# Altium PCB PCB1_old.PcbDoc (part 1 of 2)
Units mil, origin at the board's own origin, x right, y up, seen from the top; angles counter-clockwise.
Board outline 3631 x 2044 mil, 4 copper layers (Top Layer, GND, VDD, Bottom Layer), stack 62.449 mil thick; 137 components, 90 nets, 469 pads, 29 vias.
Unrouted connection lines stored in the file: 180.
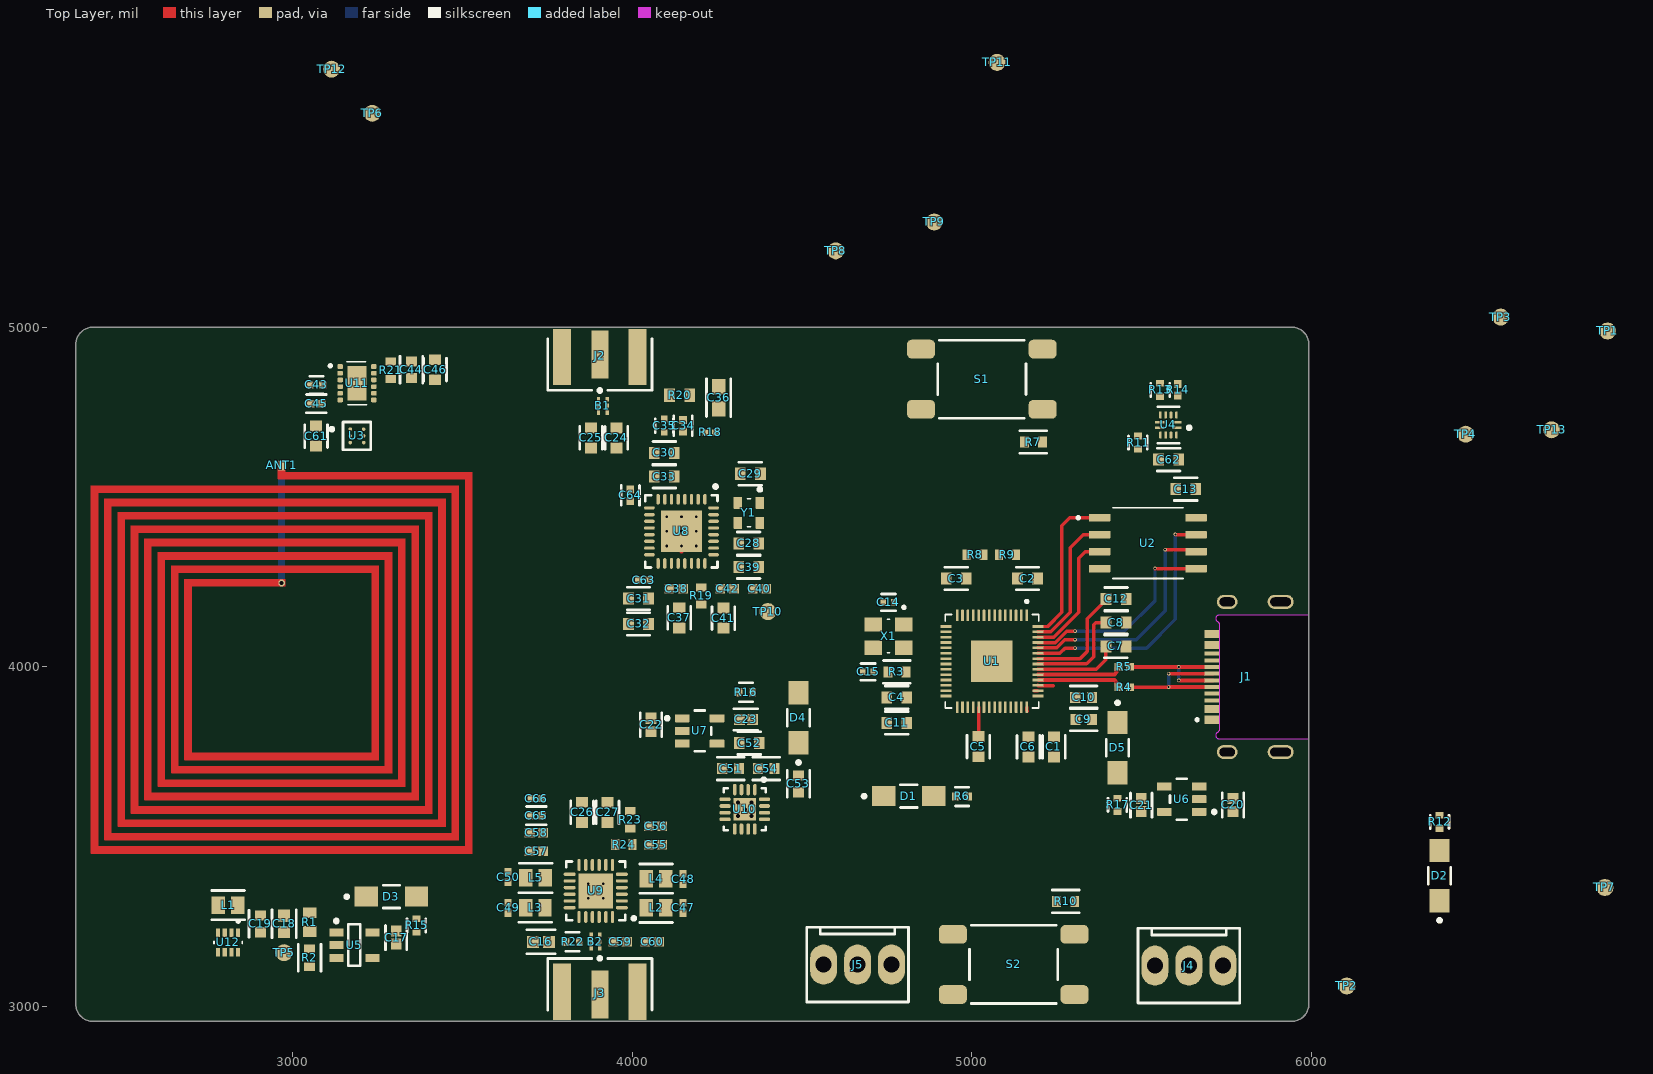
[diagram p0: Top Layer view]
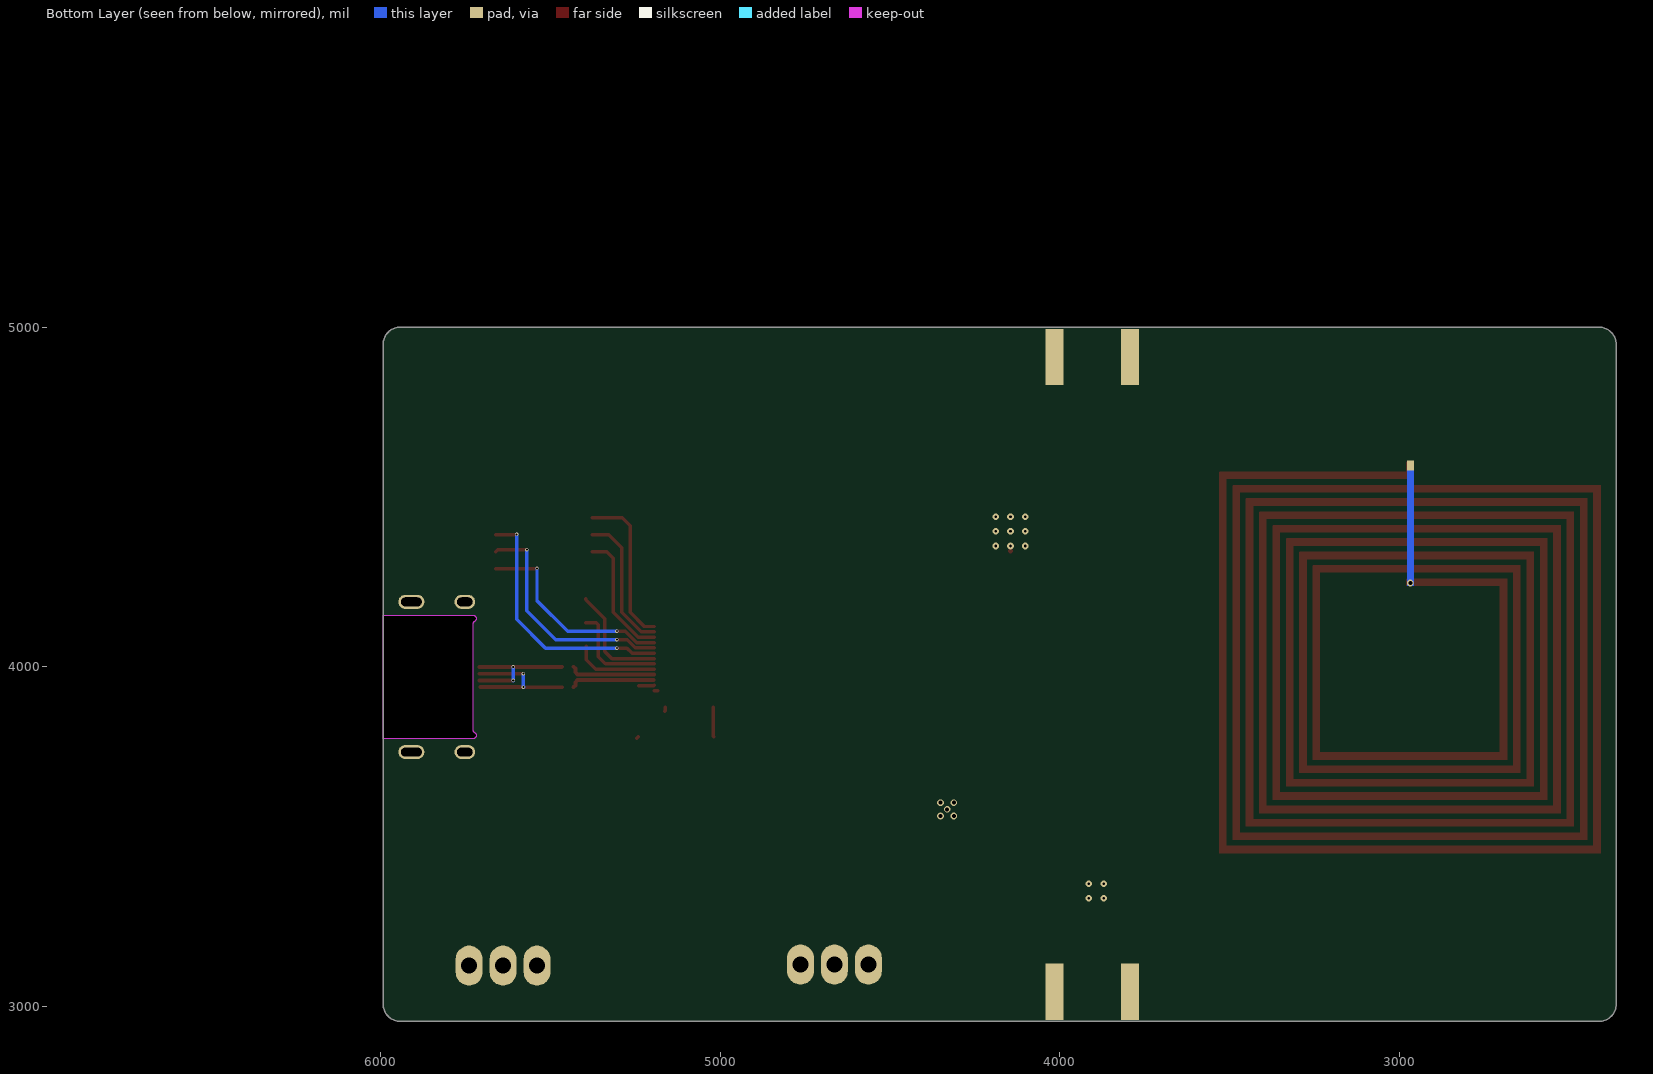
[diagram p1: Bottom Layer view, seen from below]
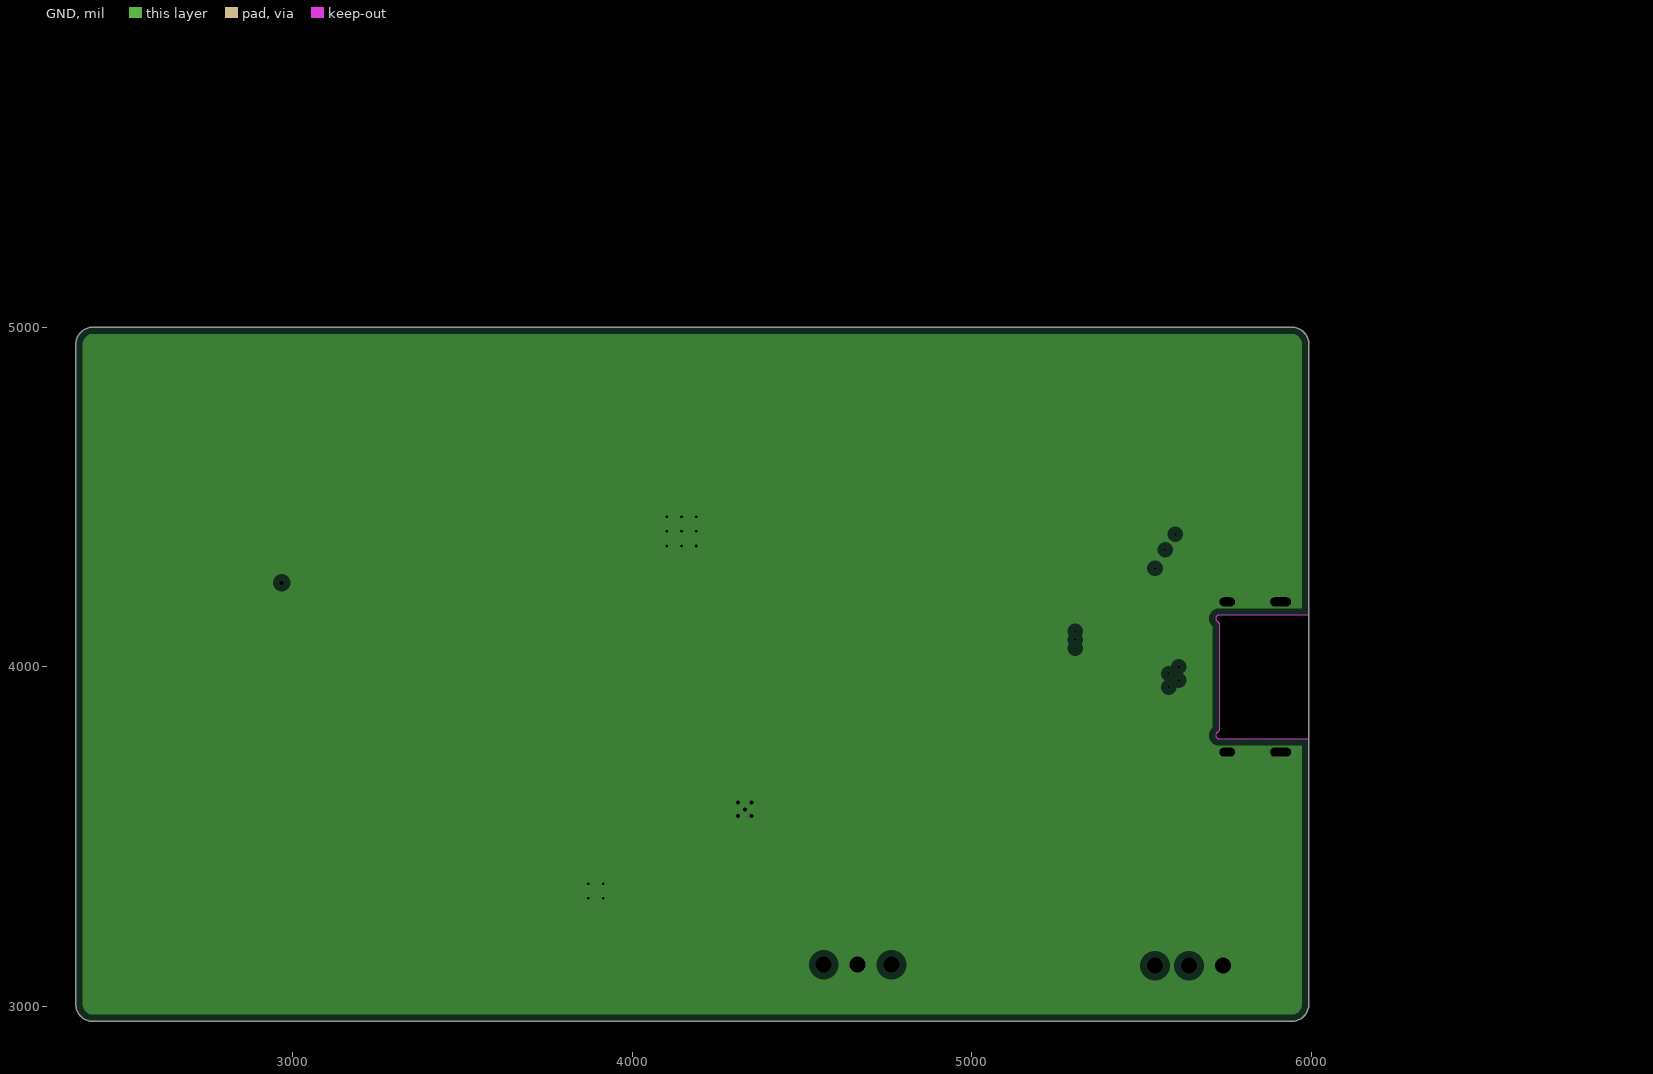
[diagram p2: GND, clearances drawn from the general rule]
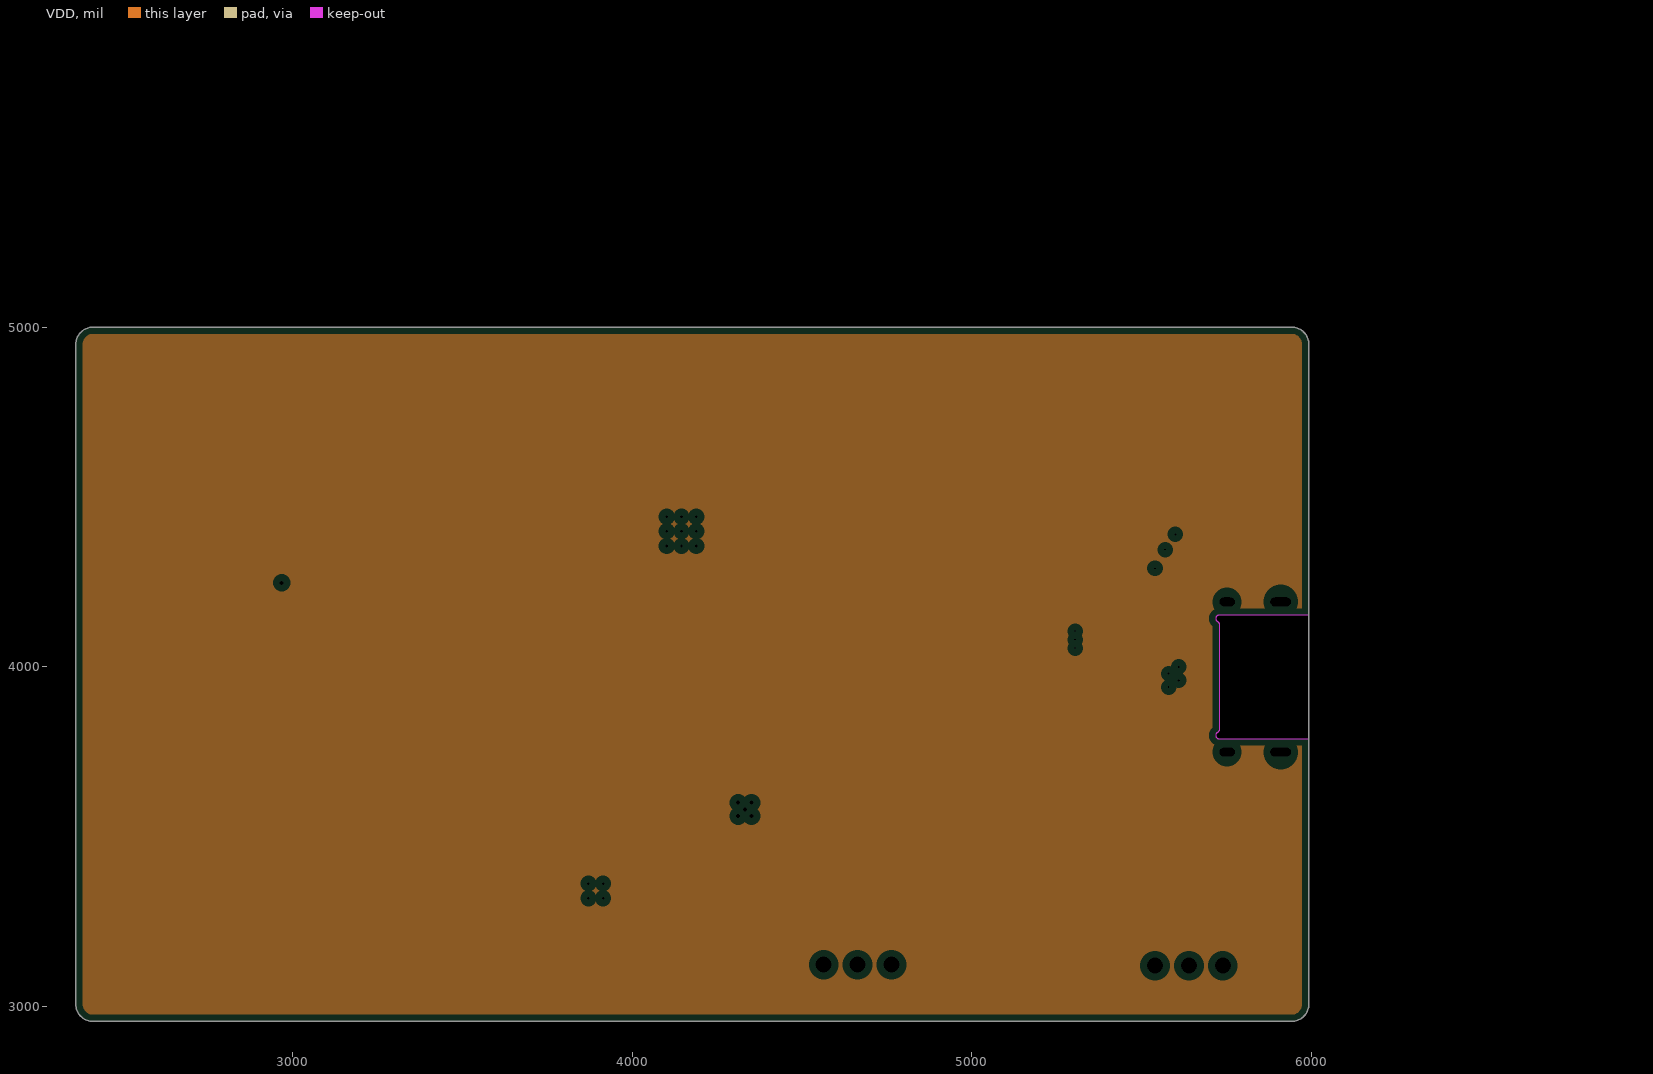
[diagram p3: VDD, clearances drawn from the general rule]

## Layer stack, top to bottom
Top Solder: solder mask 0.4, Solder Resist, Dk 3.5
Top Layer: signal copper 1.378
Dielectric 2: prepreg 8.284, PP-006, Dk 4.4
GND: plane copper 0.598, net GND
Dielectric 1: core 41.929, FR-4, Dk 4.6
VDD: plane copper 0.598, net +3V3
Dielectric 3: prepreg 8.284, PP-006, Dk 4.4
Bottom Layer: signal copper 1.378
Bottom Solder: solder mask 0.4, Solder Resist, Dk 3.5

## Board outline
2362,3006 2362,4950 cw(c2412,4950) 2412,5000 5943,5000 cw(c5943,4950) 5993,4950 5993,3006 cw(c5943,3006) 5943,2956 2412,2956 cw(c2412,3006)

## Design rules (kind name [scope] priority, off if disabled: settings)
Clearance [All] p1: gap=4 ignorepadtopadclearanceinfootprint=FALSE except(5: Arc-Via Track-Via SMDPad-Via THPad-Via Via-Via Via-Fill Via-Poly Via-Region Via-Text; 9.84: Arc-Hole Track-Hole SMDPad-Hole THPad-Hole Via-Hole Fill-Hole Poly-Hole Region-Hole Text-Hole)
DiffPairsRouting [All] p1: maxlimit=10 minlimit=5 mostfreqgap=8 toplayer_minwidth=6.5 toplayer_maxwidth=50 toplayer_prefwidth=10 bottomlayer_minwidth=6.5 bottomlayer_maxwidth=50 bottomlayer_prefwidth=10 maxuncoupledlength=500
PlaneClearance [All] p1: clearance=20
PlaneConnect [All] p1: planeconnectstyle=Relief reliefexpansion=20 reliefentries=4 reliefconductorwidth=10 reliefairgap=10
PolygonConnect [All] p1: connectstyle=Relief reliefconductorwidth=10 reliefentries=4 polygonreliefangle="90 Angle" airgapwidth=10
RoutingVias [All] p1: holewidth=6 width=10 viastyle="Through Hole" minholewidth=6 minwidth=10 maxholewidth=28 maxwidth=50
SilkToSolderMaskClearance [IsPad] p1: minsilkscreentomaskgap=6 clearancetoexposedcopper=TRUE
SolderMaskExpansion [All] p1: expansion=4 istentingtop=FALSE
SupplyNets "Schematic Supply Nets_3" [InNet('+3V3A')] p1: voltage=0.000
SupplyNets "Schematic Supply Nets_2" [InNet('+5')] p2: voltage=0.000
SupplyNets "Schematic Supply Nets_1" [InNet('+3V3')] p3: voltage=0.000
SupplyNets "Schematic Supply Nets" [InNet('GND')] p4: voltage=0.000
Width [All] p1: maxlimit=50 minlimit=10 preferedwidth=10 minimp=50.000000 maximp=50.000000 favimp=50.000000
26 further rules are at their usual default settings.

## Classes and differential pairs
component class top: J1 J2 J3
component class Designator: C1 C2 C3 C4 C5 C6 C7 C8 C9 C10 C11 C12 C13 C14 C15 C61 D1 J4 J5 R3 R4 R5 R6 R7 R8 R9 R10 S1 S2 TP1 TP2 TP3 U1 U2 U3 X1
differential pair USB: +USB_P -USB_N
differential pair rfoutB: +rfoutB_P -rfoutB_N
differential pair rfoutA: +rfoutA_P -rfoutA_N
differential pair rf_ref: +rf_ref_P -rf_ref_N
differential pair res_out: +res_out_P -res_out_N
differential pair Q: +Q_P -Q_N
differential pair Q_O: +Q_O_P -Q_O_N
differential pair I: +I_P -I_N
differential pair I_O: +I_O_P -I_O_N

## Components (designator, comment, footprint, x,y, rotation, side; value= is the part's Value field where it differs from the comment)
ANT1 "nfc_antenna" nfc_antenna 2945,3980 r270 top
B1 "LDB182G8AAAEA050" Balum 3913.9,4768.51 r0 top
B2 "LDB182G8AAAEA050" Balum 3892.2,3190.32 r180 top
C1 "CC0603KRX7R7BB104" FP-CC0603-DA-MFG 5242,3764 r270 top value="100 nF"
C2 "CC0603KRX7R7BB104" FP-CC0603-DA-MFG 5164.53,4260 r0 top value="100 nF"
C3 "CC0603KRX7R7BB104" FP-CC0603-DA-MFG 4955,4260 r180 top value="100 nF"
C4 "CC0603KRX7R7BB104" FP-CC0603-DA-MFG 4779.53,3910 r180 top value="100 nF"
C5 "CC0603KRX7R7BB104" FP-CC0603-DA-MFG 5020,3765 r270 top value="100 nF"
C6 "CC0603KRX7R7BB104" FP-CC0603-DA-MFG 5167,3764 r270 top value="100 nF"
C7 "CC0603KRX7R7BB104" FP-CC0603-DA-MFG 5425,4060 r0 top value="100 nF"
C8 "CC0603KRX7R7BB104" FP-CC0603-DA-MFG 5425.47,4130 r0 top value="100 nF"
C9 "CL10B105KP8NNNC" FP-CL10-IPC_C 5330.32,3845 r0 top
C10 "CL10B105KP8NNNC" FP-CL10-IPC_C 5329.68,3910 r0 top
C11 "CC0603KRX7R7BB104" FP-CC0603-DA-MFG 4779.53,3835 r180 top value="100 nF"
C12 "CC0603KRX7R7BB104" FP-CC0603-DA-MFG 5425.47,4200 r0 top value="100 nF"
C13 "CC0603KRX7R7BB104" FP-CC0603-DA-MFG 5630.6,4523.3 r180 top value="100 nF"
C14 "GJM1555C1H150GB01D" FP-GJM155-0_05-MFG 4755,4190 r180 top
C15 "GJM1555C1H150GB01D" FP-GJM155-0_05-MFG 4695,3985 r180 top
C16 "GRM188R61A226ME15D" FP-GRM188-0_2-IPC_C 3731.36,3190 r0 top
C17 "GRM155R61A106ME11D" FP-GRM155-0_2-IPC_A 3305.2,3202.28 r270 top
C18 "GRM188R61A226ME15D" FP-GRM188-0_2-IPC_C 2975.2,3243.03 r90 top
C19 "CL10B105KP8NNNC" FP-CL10-IPC_C 2905.2,3243.03 r90 top
C20 "GRM155R61A106ME11D" FP-GRM155-0_2-IPC_A 5769.69,3593.29 r90 top
C21 "GRM155R61A106ME11D" FP-GRM155-0_2-IPC_A 5499.69,3592.54 r90 top
C22 "GRM155R61A106ME11D" FP-GRM155-0_2-IPC_A 4056,3829.25 r270 top
C23 "GRM155R61A106ME11D" FP-GRM155-0_2-IPC_A 4335,3845 r0 top
C24 "CC0603KRX7R7BB104" FP-CC0603-DA-MFG 3953.9,4673.98 r90 top value="100 nF"
C25 "CC0603KRX7R7BB104" FP-CC0603-DA-MFG 3878.9,4673.98 r90 top value="100 nF"
C26 "CC0603KRX7R7BB104" FP-CC0603-DA-MFG 3852.87,3571.1 r270 top value="100 nF"
C27 "CC0603KRX7R7BB104" FP-CC0603-DA-MFG 3927.87,3571.1 r270 top value="100 nF"
C28 "CC0603KRX7R7BB104" FP-CC0603-DA-MFG 4343.43,4363.51 r0 top value="100 nF"
C29 "CC0603KRX7R7BB104" FP-CC0603-DA-MFG 4348.43,4568.51 r0 top value="100 nF"
C30 "CC0603KRX7R7BB104" FP-CC0603-DA-MFG 4095,4630 r180 top value="100 nF"
C31 "CC0603KRX7R7BB104" FP-CC0603-DA-MFG 4018.98,4201.1 r180 top value="100 nF"
C32 "CC0603KRX7R7BB104" FP-CC0603-DA-MFG 4018.98,4126.1 r180 top value="100 nF"
C33 "CC0603KRX7R7BB104" FP-CC0603-DA-MFG 4095,4560 r180 top value="100 nF"
C34 "GCM155R71C393KA37D" FP-GCM155-0_05-IPC_B 4150,4710 r90 top
C35 "CC0402KPX7R9BB272" FP-CC0402-MFG 4095,4710 r90 top value="2.7 nF"
C36 "GCM1885C1H122JA16J" FP-GCM188-0_1-IPC_A 4255,4792.55 r90 top
C37 "CC0603KRX7R7BB104" FP-CC0603-DA-MFG 4138.9,4143.98 r270 top value="100 nF"
C38 "CC0402JRNPO9BN100" CAPC1005X55X25ML05T05 4130,4230 r0 top
C39 "CC0603KRX7R7BB104" FP-CC0603-DA-MFG 4343.43,4293.51 r0 top value="100 nF"
C40 "CC0402JRNPO9BN100" CAPC1005X55X25ML05T05 4375.08,4230 r180 top
C41 "CC0603KRX7R7BB104" FP-CC0603-DA-MFG 4268.9,4143.51 r270 top value="100 nF"
C42 "CC0402JRNPO9BN100" CAPC1005X55X25ML05T05 4279.92,4230 r180 top
C43 "GRM1555C1H120GA01D" FP-GRM155-0_05-MFG 3070,4830 r180 top
C44 "CL10B105KP8NNNC" FP-CL10-IPC_C 3350,4874.68 r90 top
C45 "GCM1555C1H620GA16J" FP-GCM155-0_05-IPC_B 3070,4775 r180 top value=62pF
C46 "CC0603KRX7R7BB104" FP-CC0603-DA-MFG 3420,4875 r90 top value="100 nF"
C47 "GRM1555C1H270JA01D" CAPC1005X55X25LL05T10 4150,3289.65 r90 top
C48 "GRM1555C1H270JA01D" CAPC1005X55X25LL05T10 4150,3375 r270 top
C49 "1" CAPC1005X55X25LL05T10 3635,3289.65 r90 top
C50 "GRM1555C1H270JA01D" CAPC1005X55X25LL05T10 3635,3380.35 r270 top
C51 "CL10B105KP8NNNC" FP-CL10-IPC_C 4290.32,3700 r180 top
C52 "CC0603KRX7R7BB104" FP-CC0603-DA-MFG 4345,3775 r0 top value="100 nF"
C53 "CL10B105KP8NNNC" FP-CL10-IPC_C 4490,3655 r90 top
C54 "CL10B105KP8NNNC" FP-CL10-IPC_C 4395,3700 r0 top
C55 "GRM155R71H102KA01D" CAPC1005X55X25ML5T10 4069.29,3476.41 r180 top
C56 "GRM1555C1H101JA01D" CAPC1005X55X25ML05T10 4069.29,3530 r180 top
C57 "GRM155R71H102KA01D" CAPC1005X55X25ML5T10 3717.87,3456.57 r0 top
C58 "GRM1555C1H101JA01D" CAPC1005X55X25ML05T10 3717.87,3511.57 r0 top
C59 "GRM155R71H102KA01D" CAPC1005X55X25ML5T10 3965,3190 r0 top
C60 "GRM1555C1H101JA01D" CAPC1005X55X25ML05T10 4059.29,3190 r180 top
C61 "CC0603KRX7R7BB104" FP-CC0603-DA-MFG 3069.37,4679.53 r270 top value="100 nF"
C62 "CC0603KRX7R7BB104" FP-CC0603-DA-MFG 5580,4610 r180 top value="100 nF"
C63 "1" CAPC1005X55X25LL05T10 4035,4255 r0 top
C64 "GCM155R71C393KA37D" FP-GCM155-0_05-IPC_B 3995,4505 r90 top
C65 "GCM155R71C393KA37D" FP-GCM155-0_05-IPC_B 3717.87,3561.57 r180 top
C66 "1" CAPC1005X55X25LL05T10 3717.87,3611.57 r0 top
D1 "CMD15-21VRD/TR8" FP-CMD15-21-MFG 4815.11,3619.05 r0 top
D2 "CMD15-21VRD/TR8" FP-CMD15-21-MFG 6377.95,3385.11 r90 top
D3 "CMD15-21VRD/TR8" FP-CMD15-21-MFG 3291.38,3323.03 r0 top
D4 "CMD15-21VRD/TR8" FP-CMD15-21-MFG 4490,3850 r90 top
D5 "CMD15-21VRD/TR8" FP-CMD15-21-MFG 5429.69,3762.11 r270 top
J1 "GSB1C4621DS1HR" AMPHENOL_GSB1C4621DS1HR 5910,3970 r90 top
J2 "SMA-J-P-H-ST-EM1" FP-SMA-J-P-H-ST-EM1-MFG 3905,5182.2 r180 top
J3 "SMA-J-P-H-ST-EM1" FP-SMA-J-P-H-ST-EM1-MFG 3905,2772.8 r0 top
J4 "0022272031" "MOLEX KK 0022272031" 5640,3120 r180 top
J5 "0022272031" "MOLEX KK 0022272031" 4664,3123 r180 top
L1 "LQM21PN1R0NGRD" FP-LQM21PH_G0-IPC_C 2810.2,3298.03 r0 top
L2 "LQM21PN1R0NGRD" FP-LQM21PH_G0-IPC_C 4070.63,3290 r0 top
L3 "LQM21PN1R0NGRD" FP-LQM21PH_G0-IPC_C 3715,3291 r180 top
L4 "LQM21PN1R0NGRD" FP-LQM21PH_G0-IPC_C 4070.63,3376 r0 top
L5 "LQM21PN1R0NGRD" FP-LQM21PH_G0-IPC_C 3716,3378 r180 top
R1 "RK73H1JTTD91R0F" RESC1608X55X30NL20T10 3050.2,3248.03 r270 top
R2 "RC0603FR-071KL" FP-RC0603-0_55-IPC_C 3050.2,3143.03 r270 top
R3 "RC0603FR-071KL" FP-RC0603-0_55-IPC_C 4780,3985 r0 top
R4 "RC0402JR-0727RL" RESC1005X40X25NL05T10 5450,3940 r0 top
R5 "RC0402JR-0727RL" RESC1005X40X25NL05T10 5450,4000 r0 top
R6 "RT0402BRD07200RL" FP-RT0402-MFG 4972.11,3618.05 r0 top value=200Ω
R7 "RC0603FR-071KL" FP-RC0603-0_55-IPC_C 5182,4662 r0 top
R8 "RC0603FR-074K7L" RESC1608X55X25LL10T15 5010,4330 r180 top
R9 "RC0603FR-074K7L" RESC1608X55X25LL10T15 5105.59,4330 r0 top
R10 "RC0603FR-071KL" FP-RC0603-0_55-IPC_C 5277,3309 r180 top
R11 "RT0402BRD07200KL" FP-RT0402-MFG 5490,4660 r270 top value=200KΩ
R12 "RT0402BRD07200RL" FP-RT0402-MFG 6377.95,3543.43 r90 top value=200Ω
R13 "RT0402BRD07200KL" FP-RT0402-MFG 5555,4815.31 r90 top value=200KΩ
R14 "RC0402FR-07910KL" RESC1005X40X25NL05T10 5607.13,4815.47 r270 top value=900k
R15 "RT0402BRD07200RL" FP-RT0402-MFG 3365.2,3238.35 r270 top value=200Ω
R16 "RT0402BRD07200RL" FP-RT0402-MFG 4335,3925 r180 top value=200Ω
R17 "RT0402BRD07200RL" FP-RT0402-MFG 5429.69,3593.29 r270 top value=200Ω
R18 "RC0402JR-07680RL" RESC1005X40X25LL05T10 4230,4690 r0 top
R19 "RC0603FR-074K7L" RESC1608X55X25LL10T15 4203.9,4208.51 r90 top
R20 "RC0603JR-07360RL" RESC1608X55X25ML10T15 4140,4800 r0 top
R21 "RC0603FR-074K7L" RESC1608X55X25LL10T15 3289,4873 r270 top
R22 "RT0402BRD07200RL" FP-RT0402-MFG 3825,3190 r180 top value=200Ω
R23 "RC0603FR-074K7L" RESC1608X55X25LL10T15 3995,3550 r90 top
R24 "RC0603FR-074K7L" RESC1608X55X25LL10T15 3976,3476.41 r0 top
S1 "FSM4JSMA" "TE FSM4JSMA" 5030,4847 r90 top
S2 "FSM4JSMA" "TE FSM4JSMA" 5123.87,3123.42 r270 top
TP1 "Test Point" test_point 6873,4989 r90 top
TP2 "Test Point" test_point 6105,3060 r0 top
TP3 "Test Point" test_point 6558,5030 r90 top
TP4 "Test Point" test_point 6455,4685 r0 top
TP5 "Test Point" test_point 2975.2,3158.03 r90 top
TP6 "Test Point" test_point 3235,5630 r90 top
TP7 "Test Point" test_point 6865,3350 r0 top
TP8 "Test Point" test_point 4600,5225 r270 top
TP9 "Test Point" test_point 4890,5310 r270 top
TP10 "Test Point" test_point 4399.9,4162.51 r0 top
TP11 "Test Point" test_point 5075,5780 r90 top
TP12 "Test Point" test_point 3115,5760 r90 top
TP13 "Test Point" test_point 6708,4698 r90 top
U1 "rp2040" QFN40P700X700X90-57N 5059.88,4016.24 r270 top
U2 "W25Q128JVSIQ" SOIC127P790X216-8N 5519.18,4364.05 r0 top
U3 "HDC2010YPAR" FP-YPA0006-MFG 3189.68,4680 r0 top
U4 "TUSB320LAIRWBR" FP-RWB0012A-MFG 5579.41,4712.13 r180 top
U5 "AP7375-50W5-7" "DIODES SOT25" 3182.05,3180.43 r0 top
U6 "TLV73333PDBVR" FP-DBV0005A-MFG 5618.82,3610 r180 top
U7 "TLV73333PDBVR" FP-DBV0005A-MFG 4199,3811 r0 top
U8 "ADF4351BCPZ-RL7" ADI-CP-32-2_L 4145.51,4398.9 r270 top
U9 "ADL5380ACPZ-R7" ADI-CP-24-3_N 3893.03,3339.8 r180 top
U10 "ADS7945SRTER" TI-RTE16-1700X1700TP_V 4331.93,3580.16 r270 top
U11 "ST25DV64KC-JF6D3" PSON50P300X300X60-13N 3190,4835 r0 top
U12 "TPS631000DRLR" SOT50P160X60-8N 2810.2,3188.03 r270 top
X1 "ABM8-272-T3" XTAL_ABM8-272-T3 4755.28,4090.55 r270 top
Y1 "LMK6CE02500CDLFR" DLF0004A_MFG 4343.9,4453.51 r270 top

## Footprints (in the part's own frame and the unit in brackets; to place one, negate y for a bottom-side part, rotate by r counter-clockwise, add the part's x,y. Pads: shape width x height; smd on the part's side, far side on the other; paste and mask are expansions set on the pad)
ADI-CP-24-3_N [mm] "QFN, 24-Leads, Body 4x4mm, Pitch 0.5mm, Thermal Pad 2.5x2.5mm, IPC Medium Density"
  oval 0.9x0.25 smd: 1(-1.95,1.25) 2(-1.95,0.75) 3(-1.95,0.25) 4(-1.95,-0.25) 5(-1.95,-0.75) 6(-1.95,-1.25) 13(1.95,-1.25) 14(1.95,-0.75) 15(1.95,-0.25) 16(1.95,0.25) 17(1.95,0.75) 18(1.95,1.25)
  oval 0.25x0.9 smd: 7(-1.25,-1.95) 8(-0.75,-1.95) 9(-0.25,-1.95) 10(0.25,-1.95) 11(0.75,-1.95) 12(1.25,-1.95) 19(1.25,1.95) 20(0.75,1.95) 21(0.25,1.95) 22(-0.25,1.95) 23(-0.75,1.95) 24(-1.25,1.95)
  rect 2.6x2.6 smd: 25(0,0)
  silkscreen extent -2.98,-2.2 2.2,2.2, body extent -2.05,-2.05 2.05,2.05, height 1
ADI-CP-32-2_L [mm] "QFN, 32-Leads, Body 5x5mm, Pitch 0.5mm, Thermal Pad 3.1x3.1mm, IPC High Density"
  oval 0.8x0.25 smd: 1(-2.4,1.75) 2(-2.4,1.25) 3(-2.4,0.75) 4(-2.4,0.25) 5(-2.4,-0.25) 6(-2.4,-0.75) 7(-2.4,-1.25) 8(-2.4,-1.75) 17(2.4,-1.75) 18(2.4,-1.25) 19(2.4,-0.75) 20(2.4,-0.25) 21(2.4,0.25) 22(2.4,0.75) 23(2.4,1.25) 24(2.4,1.75)
  oval 0.25x0.8 smd: 9(-1.75,-2.4) 10(-1.25,-2.4) 11(-0.75,-2.4) 12(-0.25,-2.4) 13(0.25,-2.4) 14(0.75,-2.4) 15(1.25,-2.4) 16(1.75,-2.4) 25(1.75,2.4) 26(1.25,2.4) 27(0.75,2.4) 28(0.25,2.4) 29(-0.25,2.4) 30(-0.75,2.4) 31(-1.25,2.4) 32(-1.75,2.4)
  rect 3.1x3.1 smd: 33(0,0)
  silkscreen extent -3.47,-2.7 2.7,2.7, body extent -2.55,-2.55 2.55,2.55, height 1
AMPHENOL_GSB1C4621DS1HR [mm]
  rect 0.6x1.1 smd mask+0.05: A1_B12(-3.2,5.15) A4_B9(-2.4,5.15) B1_A12(3.2,5.15) B4_A9(2.4,5.15)
  rect 0.3x1.1 smd mask+0.05: A5(-1.25,5.15) A6(-0.25,5.15) A7(0.25,5.15) A8(1.25,5.15) B5(1.75,5.15) B6(0.75,5.15) B7(-0.75,5.15) B8(-1.75,5.15)
  oval 1.05x1.55 hole 0.65 slot 1.15 at 90 deg: SH1(-5.62,4) SH2(5.62,4)
  oval 1.05x1.95 hole 0.65 slot 1.55 at 90 deg: SH3(-5.62,0) SH4(5.62,0)
  Keep-Out Layer board cut-out: -4.619,4.622 -4.62,4.6 -4.62,-2.1 4.62,-2.1 4.62,4.6 4.619,4.622 4.616,4.643 4.611,4.665 4.605,4.686 4.597,4.706 4.587,4.725 4.575,4.743 4.562,4.761 4.547,4.777 4.531,4.792 4.513,4.805 4.495,4.817 4.476,4.827 4.456,4.835 4.435,4.841 4.413,4.846 4.392,4.849 4.37,4.85 4.348,4.849 4.327,4.846 4.305,4.841 4.284,4.835 4.264,4.827 4.245,4.817 4.227,4.805 4.209,4.792 4.193,4.777 4.178,4.761 4.165,4.743 4.154,4.725 4.149,4.718 4.144,4.71 4.139,4.703 4.134,4.696 4.129,4.689 4.123,4.683 4.117,4.676 4.111,4.67 4.104,4.664 4.098,4.658 4.091,4.653 4.084,4.648 4.077,4.643 4.069,4.638 4.062,4.633 4.054,4.629 4.047,4.625 4.039,4.622 4.031,4.618 4.022,4.615 4.014,4.612 4.006,4.61 3.997,4.607 3.989,4.605 3.98,4.604 3.972,4.602 3.963,4.601 3.954,4.601 3.946,4.6 3.937,4.6 -3.937,4.6 -3.946,4.6 -3.954,4.601 -3.963,4.601 -3.972,4.602 -3.98,4.604 -3.989,4.605 -3.997,4.607 -4.006,4.61 -4.014,4.612 -4.022,4.615 -4.031,4.618 -4.039,4.622 -4.047,4.625 -4.054,4.629 -4.062,4.633 -4.069,4.638 -4.077,4.643 -4.084,4.648 -4.091,4.653 -4.098,4.658 -4.104,4.664 -4.111,4.67 -4.117,4.676 -4.123,4.683 -4.129,4.689 -4.134,4.696 -4.139,4.703 -4.144,4.71 -4.149,4.718 -4.154,4.725 -4.165,4.743 -4.178,4.761 -4.193,4.777 -4.209,4.792 -4.227,4.805 -4.245,4.817 -4.264,4.827 -4.284,4.835 -4.305,4.841 -4.327,4.846 -4.348,4.849 -4.37,4.85 -4.392,4.849 -4.413,4.846 -4.435,4.841 -4.456,4.835 -4.476,4.827 -4.495,4.817 -4.513,4.805 -4.531,4.792 -4.547,4.777 -4.562,4.761 -4.575,4.743 -4.587,4.725 -4.597,4.706 -4.605,4.686 -4.611,4.665 -4.616,4.643
  silkscreen extent -3.3,6.15 -3.1,6.35, body extent -5.77,3.51 5.77,10.71, height 1.58
Balum [mm]
  rect 0.25x0.35 smd mask+0.05: 1(-0.325,0.5) 2(-0.325,0) 3(-0.325,-0.5) 4(0.325,-0.5) 5(0.325,0) 6(0.325,0.5)
CAPC1005X55X25LL05T10 [mm] "Chip Capacitor, 2-Leads, Body 1.00x0.50mm, IPC High Density"
  rect 0.56x0.52 smd: 1(-0.39,0) 2(0.39,0)
  body extent -0.53,-0.28 0.53,0.28, height 0.55
CAPC1005X55X25ML05T05 [mm] "Chip Capacitor, 2-Leads, Body 1.00x0.50mm, IPC Low Density"
  rect 0.72x0.72 smd: 1(-0.51,0) 2(0.51,0)
  body extent -0.53,-0.28 0.53,0.27, height 0.55
CAPC1005X55X25ML5T10 [mm] "Chip Capacitor, 2-Leads, Body 1.05x0.55mm, IPC Low Density"
  rect 0.76x0.72 smd: 1(-0.49,0) 2(0.49,0)
  body extent -0.53,-0.28 0.53,0.28, height 0.55
CAPC1005X55X25ML05T10 [mm] "Chip Capacitor, 2-Leads, Body 1.00x0.50mm, IPC Low Density"
  rect 0.76x0.72 smd: 1(-0.49,0) 2(0.49,0)
  body extent -0.53,-0.28 0.53,0.27, height 0.55
"DIODES SOT25" [mm] "SOT25, 5-Leads, Body 3.00x2.85mm, Pitch 0.95mm, IPC Medium Density"
  rect 1.05x0.6 smd: 1(-1.35,0.95) 2(-1.35,0) 3(-1.35,-0.95) 4(1.35,-0.95) 5(1.35,0.95)
  silkscreen extent -1.47,-1.55 0.45,1.92, body extent -1.5,-1.55 1.5,1.55, height 1.45
DLF0004A_MFG [mm] "Recommended Land Pattern"
  rrect15% 0.9x0.65 smd: 1(-0.75,0.825) 2(-0.75,-0.825) 3(0.75,-0.825) 4(0.75,0.825)
  silkscreen extent -1.87,-0.13 1.05,0.95, body extent -1.3,-1.4 1.3,1.4, height 0.25
FP-CC0402-MFG [mm]
  rect 0.5x0.5 smd paste+0 mask+0: 1(-0.5,0) 2(0.5,0)
  silkscreen extent -0.53,-0.68 0.53,0.67, body extent -0.87,-0.48 0.87,0.48, height 0.25
FP-CC0603-DA-MFG [mm]
  rect 0.8x0.9 smd paste+0 mask+0: 1(-0.75,0) 2(0.75,0)
  silkscreen extent -0.85,-0.85 0.85,0.85, body extent -1.35,-0.75 1.35,0.75, height 0.25
FP-CL10-IPC_C [mil]
  rect 29.85x31.97 smd paste+0 mask+0: 1(-24.68,0) 2(24.68,0)
  silkscreen extent -40,-33 40,33, body extent -44,-22 44,22, height 10
FP-CMD15-21-MFG [mm]
  rect 1.75x1.5 smd paste+0 mask+0: 1(-1.875,0) 2(1.875,0)
  silkscreen extent -3.47,-0.85 0.63,0.85, body extent -2.85,-0.95 2.85,0.95, height 0.25
FP-DBV0005A-MFG [mm]
  rrect17% 1.1x0.6 smd paste+0 mask+0: 1(-1.3,0.95) 2(-1.3,0) 3(-1.3,-0.95) 4(1.3,-0.95) 5(1.3,0.95)
  silkscreen extent -2.55,-1.53 0.87,1.52, body extent -1.95,-1.78 1.95,1.78, height 0.25
FP-GCM155-0_05-IPC_B [mil]
  rect 24.23x22.54 smd paste+0 mask+0: 1(-16.87,0) 2(16.87,0)
  silkscreen extent -29,-27 29,27, body extent -35,-17 35,17, height 10
FP-GCM188-0_1-IPC_A [mil]
  rect 45.62x39.85 smd paste+0 mask+0: 1(-32.55,0) 2(32.55,0)
  silkscreen extent -55,-36 55,36, body extent -75,-40 75,40, height 10
FP-GJM155-0_05-MFG [mm]
  rect 0.4x0.5 smd paste+0 mask+0: 1(-0.4,0) 2(0.4,0)
  silkscreen extent -0.53,-0.63 0.53,0.63, body extent -0.7,-0.38 0.7,0.38, height 0.25
FP-GRM155-0_2-IPC_A [mil]
  rect 32.6x31.74 smd paste+0 mask+0: 1(-19.25,0) 2(19.25,0)
  silkscreen extent -36,-32 36,32, body extent -43,-24 43,24, height 10
FP-GRM155-0_05-MFG [mm]
  rect 0.55x0.5 smd paste+0 mask+0: 1(-0.475,0) 2(0.475,0)
  silkscreen extent -0.5,-0.65 0.5,0.65, body extent -0.85,-0.38 0.85,0.38, height 0.25
FP-GRM188-0_2-IPC_C [mil]
  rect 35.63x35.68 smd paste+0 mask+0: 1(-23.64,0) 2(23.64,0)
  silkscreen extent -41,-35 41,35, body extent -45,-24 45,24, height 10
FP-LQM21PH_G0-IPC_C [mil]
  rect 39.61x51.5 smd paste+0 mask+0: 1(-28.59,0) 2(28.59,0)
  silkscreen extent -48,-43 48,43, body extent -52,-31 52,31, height 10
FP-RC0603-0_55-IPC_C [mil]
  rect 25.93x31.97 smd paste+0 mask+0: 1(-26.64,0) 2(26.64,0)
  silkscreen extent -40,-33 40,33, body extent -44,-22 44,22, height 10
FP-RT0402-MFG [mm]
  rect 0.5x0.6 smd paste+0 mask+0: 1(-0.5,0) 2(0.5,0)
  silkscreen extent -0.5,-0.71 0.5,0.7, body extent -0.85,-0.4 0.85,0.4, height 0.25
FP-RWB0012A-MFG [mm]
  rrect50% 0.7x0.2 smd paste-1000 mask+0: 1(-0.65,0.2) 2(-0.65,-0.2) 7(0.65,-0.2) 8(0.65,0.2)
  rrect50% 0.2x0.5 smd paste+0 mask+0: 3(-0.6,-0.75) 4(-0.2,-0.75) 5(0.2,-0.75) 6(0.6,-0.75) 9(0.6,0.75) 10(0.2,0.75) 11(-0.2,0.75) 12(-0.6,0.75)
  silkscreen extent -1.68,-1.38 0.8,1.38, body extent -1.1,-1.1 1.1,1.1, height 0.25
FP-SMA-J-P-H-ST-EM1-MFG [mm]
  rect 1.27x3.6 smd paste+0 mask+0: 1(0,6.66)
  rect 1.35x4.2 smd paste+0 mask+0: 2(-2.825,6.86) 3(2.825,6.86)
  rect 1.35x4.2 smd far side paste+0 mask+0: 4(-2.825,6.86) 5(2.825,6.86)
  silkscreen extent -3.9,5.5 3.9,9.48, body extent -3.6,-4.92 3.6,9.06, height 0.25
FP-YPA0006-MFG [mm]
  round 0.263 smd paste-1000 mask-1000: A1(-0.5,0.5) A2(0.5,0.5) B1(-0.5,0) B2(0.5,0) C1(-0.5,-0.5) C2(0.5,-0.5)
  silkscreen extent -2,-1.04 1.04,1.04, body extent -1.24,-1.24 1.24,1.24, height 0.25
"MOLEX KK 0022272031" [mm]
  oval 2x3 hole 1.2: 1(-2.54,0) 2(0,0) 3(2.54,0)
  silkscreen extent -3.81,-2.79 3.81,2.79, body extent -3.81,-2.9 3.81,2.9, height 11.7
nfc_antenna [mil]
  rect 30x20 smd: 1(-613,23)
  rect 30x21 smd far side: 1(-613,23)
  Top Layer region: 528.76,-537.54 -553.88,-537.54 -553.88,545.1 489.39,545.1 489.39,-498.17 -514.51,-498.17 -514.51,505.73 450.02,505.73 450.02,-458.8 -475.14,-458.8 -475.14,466.36 410.65,466.36 410.65,-419.43 -435.77,-419.43 -435.77,426.99 371.28,426.99 371.28,-380.06 -396.4,-380.06 -396.4,387.62 331.91,387.62 331.91,-340.69 -357.03,-340.69 -357.03,348.25 292.54,348.25 292.54,-301.32 -317.66,-301.32 -317.66,308.88 253.17,308.88 253.17,-261.95 -278.29,-261.95 -278.29,33.29 -258.64,33.29 -258.64,-242.28 -258.64,-242.3 -258.62,-242.3 233.5,-242.3 233.52,-242.3 233.53,-242.28 233.53,289.21 233.52,289.23 233.5,289.23 -297.99,289.23 -298.01,289.23 -298.01,289.21 -298.01,-281.65 -298.01,-281.67 -297.99,-281.67 272.87,-281.67 272.89,-281.67 272.9,-281.65 272.9,328.58 272.89,328.6 272.87,328.6 -337.36,328.6 -337.38,328.6 -337.38,328.58 -337.38,-321.02 -337.38,-321.04 -337.36,-321.04 312.24,-321.04 312.26,-321.04 312.27,-321.02 312.27,367.95 312.26,367.97 312.24,367.97 -376.73,367.97 -376.75,367.97 -376.75,367.95 -376.75,-360.39 -376.75,-360.41 -376.73,-360.42 351.61,-360.41 351.63,-360.41 351.64,-360.39 351.64,407.32 351.63,407.34 351.61,407.34 -416.1,407.34 -416.12,407.34 -416.12,407.32 -416.12,-399.76 -416.12,-399.78 -416.1,-399.78 390.98,-399.78 391,-399.78 391.01,-399.76 391.01,446.69 391,446.71 390.98,446.71 -455.47,446.71 -455.49,446.71 -455.49,446.69 -455.49,-439.13 -455.49,-439.15 -455.47,-439.16 430.35,-439.16 430.37,-439.15 430.38,-439.13 430.38,486.06 430.37,486.08 430.35,486.08 -494.84,486.08 -494.86,486.08 -494.86,486.06 -494.86,-478.5 -494.86,-478.52 -494.84,-478.53 469.72,-478.53 469.74,-478.52 469.75,-478.5 469.75,525.43 469.74,525.45 469.72,525.45 -534.21,525.45 -534.23,525.45 -534.23,525.43 -534.23,-517.87 -534.23,-517.89 -534.21,-517.9 509.09,-517.9 509.11,-517.89 509.12,-517.87 509.12,564.8 509.11,564.82 509.09,564.82 -573.58,564.82 -573.6,564.82 -573.6,564.8 -573.6,13.64 -622.77,13.64 -622.77,33.29 -593.27,33.29 -593.25,33.29 -593.25,33.31 -593.25,584.47 528.76,584.47
  Top Layer lines w0.04: 528.78,-537.56 -553.9,-537.56 -553.9,545.12 489.41,545.12 489.41,-498.19 -514.53,-498.19 -514.53,505.75 450.04,505.75 450.04,-458.82 -475.16,-458.82 -475.16,466.38 410.67,466.38 410.67,-419.45 -435.79,-419.45 -435.79,427.01 371.3,427.01 371.3,-380.08 -396.42,-380.08 -396.42,387.64 331.93,387.64 331.93,-340.71 -357.05,-340.71 -357.05,348.27 292.56,348.27 292.56,-301.34 -317.68,-301.34 -317.68,308.9 253.19,308.9 253.19,-261.97 -278.31,-261.97 -278.31,33.31 -258.62,33.31 -258.62,-242.28 233.5,-242.28 233.5,289.21 -297.99,289.21 -297.99,-281.65 272.87,-281.65 272.87,328.58 -337.36,328.58 -337.36,-321.02 312.24,-321.02 312.24,367.95 -376.73,367.95 -376.73,-360.39 351.61,-360.39 351.61,407.32 -416.1,407.32 -416.1,-399.76 390.98,-399.76 390.98,446.69 -455.47,446.69 -455.47,-439.13 430.35,-439.13 430.35,486.06 -494.84,486.06 -494.84,-478.5 469.72,-478.5 469.72,525.43 -534.21,525.43 -534.21,-517.87 509.09,-517.87 509.09,564.8 -573.58,564.8 -573.58,13.62 -622.8,13.62 -622.8,33.31 -593.27,33.31 -593.27,584.49 528.78,584.49 528.78,-537.56
  Bottom Layer region: -623.03,12.79 -257.87,12.79 -257.87,33.46 -623.03,33.46
PSON50P300X300X60-13N [mm]
  rrect50% 0.42x0.35 smd: 1(-1.26,1.25) 2(-1.26,0.75) 3(-1.26,0.25) 4(-1.26,-0.25) 5(-1.26,-0.75) 6(-1.26,-1.25) 7(1.26,-1.25) 8(1.26,-0.75) 9(1.26,-0.25) 10(1.26,0.25) 11(1.26,0.75) 12(1.26,1.25)
  rect 1.4x2.55 smd paste-2: 13(0,0)
  silkscreen extent -2.1,-1.6 0.7,1.6, body extent -1.51,-1.51 1.51,1.51, height 0.6
QFN40P700X700X90-57N [mm]
  rrect25% 0.84x0.2 smd: 1(-3.435,2.6) 2(-3.435,2.2) 3(-3.435,1.8) 4(-3.435,1.4) 5(-3.435,1) 6(-3.435,0.6) 7(-3.435,0.2) 8(-3.435,-0.2) 9(-3.435,-0.6) 10(-3.435,-1) 11(-3.435,-1.4) 12(-3.435,-1.8) 13(-3.435,-2.2) 14(-3.435,-2.6) 29(3.435,-2.6) 30(3.435,-2.2) 31(3.435,-1.8) 32(3.435,-1.4) 33(3.435,-1) 34(3.435,-0.6) 35(3.435,-0.2) 36(3.435,0.2) 37(3.435,0.6) 38(3.435,1) 39(3.435,1.4) 40(3.435,1.8) 41(3.435,2.2) 42(3.435,2.6)
  rrect25% 0.2x0.84 smd: 15(-2.6,-3.435) 16(-2.2,-3.435) 17(-1.8,-3.435) 18(-1.4,-3.435) 19(-1,-3.435) 20(-0.6,-3.435) 21(-0.2,-3.435) 22(0.2,-3.435) 23(0.6,-3.435) 24(1,-3.435) 25(1.4,-3.435) 26(1.8,-3.435) 27(2.2,-3.435) 28(2.6,-3.435) 43(2.6,3.435) 44(2.2,3.435) 45(1.8,3.435) 46(1.4,3.435) 47(1,3.435) 48(0.6,3.435) 49(0.2,3.435) 50(-0.2,3.435) 51(-0.6,3.435) 52(-1,3.435) 53(-1.4,3.435) 54(-1.8,3.435) 55(-2.2,3.435) 56(-2.6,3.435)
  rect 3.1x3.1 smd paste-0.57: 57(0,0)
  silkscreen extent -4.57,-3.5 3.5,3.5, body extent -3.5,-3.5 3.5,3.5, height 0.9
RESC1005X40X25LL05T10 [mm] "Chip Resistor, 2-Leads, Body 1.00x0.50mm, IPC High Density"
  rect 0.5x0.45 smd: 1(-0.375,0) 2(0.375,0)
  body extent -0.53,-0.27 0.53,0.28, height 0.4
RESC1005X40X25NL05T10 [mm] "Chip Resistor, 2-Leads, Body 1.00x0.50mm, IPC Medium Density"
  rect 0.6x0.55 smd: 1(-0.425,0) 2(0.425,0)
  body extent -0.53,-0.27 0.53,0.28, height 0.4
RESC1608X55X25LL10T15 [mm] "Chip Resistor, 2-Leads, Body 1.60x0.80mm, IPC High Density"
  rect 0.6x0.8 smd: 1(-0.65,0) 2(0.65,0)
  body extent -0.85,-0.45 0.85,0.45, height 0.55
RESC1608X55X25ML10T15 [mm] "Chip Resistor, 2-Leads, Body 1.60x0.80mm, IPC Low Density"
  rect 0.8x1 smd: 1(-0.75,0) 2(0.75,0)
  body extent -0.85,-0.45 0.85,0.45, height 0.55
RESC1608X55X30NL20T10 [mm] "Chip Resistor, 2-Leads, Body 1.60x0.80mm, IPC Medium Density"
  rect 0.8x1 smd: 1(-0.7,0) 2(0.7,0)
  body extent -0.9,-0.5 0.9,0.5, height 0.55
SOIC127P790X216-8N [mm]
  rrect25% 1.61x0.58 smd: 1(-3.605,1.905) 2(-3.605,0.635) 3(-3.605,-0.635) 4(-3.605,-1.905) 5(3.605,-1.905) 6(3.605,-0.635) 7(3.605,0.635) 8(3.605,1.905)
  silkscreen extent -5.31,-2.64 2.64,2.64, body extent -3.95,-2.64 3.95,2.64, height 2.16
SOT50P160X60-8N [mm]
  rect 0.66x0.32 smd mask+0.05: 1(-0.735,0.75) 2(-0.735,0.25) 3(-0.735,-0.25) 4(-0.735,-0.75) 5(0.735,-0.75) 6(0.735,-0.25) 7(0.735,0.25) 8(0.735,0.75)
  silkscreen extent -1.7,-1.05 0.09,1.05, body extent -0.8,-1.05 0.8,1.05, height 0.6
"TE FSM4JSMA" [mm]
  rrect50% 1.4x2.1 smd: 1(2.25,4.55) 2(2.25,-4.55) 3(-2.25,4.55) 4(-2.25,-4.55)
  silkscreen extent -2.92,-3.3 2.92,3.3, body extent -3,-5 3,5, height 5.08
test_point [mil]
  round 50 smd: 1(0,0)
TI-RTE16-1700X1700TP_V [mm] "QFN, 16-Leads, Body 3x3mm, Pitch 0.5mm, Thermal Pad 1.7x1.7mm"
  oval 0.85x0.28 smd: 1(-1.475,0.75) 2(-1.475,0.25) 3(-1.475,-0.25) 4(-1.475,-0.75) 9(1.475,-0.75) 10(1.475,-0.25) 11(1.475,0.25) 12(1.475,0.75)
  oval 0.28x0.85 smd: 5(-0.75,-1.475) 6(-0.25,-1.475) 7(0.25,-1.475) 8(0.75,-1.475) 13(0.75,1.475) 14(0.25,1.475) 15(-0.25,1.475) 16(-0.75,1.475)
  rect 1.7x1.7 smd: 17(0,0)
  silkscreen extent -2.35,-1.57 1.57,1.58, body extent -1.5,-1.5 1.5,1.5, height 0.8
XTAL_ABM8-272-T3 [mm]
  rect 1.05x1.3 smd: 1(-0.875,1.15) 2(-0.875,-1.15) 3(0.875,-1.15) 4(0.875,1.15)
  silkscreen extent -2.24,-0.09 1.25,1.25, body extent -1.25,-1.6 1.25,1.6, height 0.7

## Part data
C1 C2 C3 C4 C5 C6 C7 C8 C11 C12 C13 C24 C25 C26 C27 C28 C29 C30 C31 C32 C33 C37 C39 C41 C46 C52 C61 C62: library part CMP-2000-05002-2, "CAP CER 0.1UF 16V X7R 0603", Capacitance="100 nF", Manufacturer=YAGEO, Package=CC0603-DA, Temperature="-55°C to +125°C", Temperature Characteristic=X7R, Temperature Coefficient=15%, Temperature Range High=+125°C, Temperature Range Low=-55°C, Tolerance=0.1, Voltage="16 V", Automotive=No, Category=Cap, ComponentLink2Description=Datasheet, ComponentLink2URL=http://www.yageo.com/documents/recent/UPY-GPHC_X7R_6.3V-to-50V_18.pdf, Device Class L1="Passive Components", Device Class L2=Capacitors, Device Class L3="Ceramic Capacitors", Digikey Description="CAP CER 0.1UF 16V X7R 0603", Footprint Url=http://www.yageo.com/exep/pages/download/literatures/UPY-C_GEN_24.pdf, Height=0.9mm, Lead Free=Yes, Manufacturer Part Number=CC0603KRX7R7BB104, Material=Ceramic, Mouser Description="Multilayer Ceramic Capacitor, CC Series, 0.1 - F, - 10%, X7R, 16 V, 0603 [1608 Metric]", Octopart=https://octopart.com/cc0603krx7r7bb104-yageo-192941, RoHS=TRUE, Voltage Rating="16 V"
C9 C10 C19 C44 C51 C53 C54: library part CMP-2000-06094-2, "Cap Ceramic 1uF 10V X7R ±10% Pad SMD 0603 +125°C T/R", Capacitance=1uF, Case Code (Imperial)=0603, Case Code (Metric)=1608, Dielectric=X7R, Max Operating Temperature=125°C, Min Operating Temperature=-55°C, Package Quantity=1, Tolerance=10%, Voltage Rating=10V, Case/Package=0603, Contact Plating=Tin, Depth=0.8mm, Height=0.8mm, Lead Free="Lead Free", Length=1.6mm, Mount="Surface Mount", Packaging="Tape and Reel", Radiation Hardening=No, Thickness=0.035inch, Voltage Rating (DC)=10V, Width=0.031inch
C14 C15: library part CMP-2008-03803-2, "Multi-Layer Ceramic Capacitor 15pF C0G  ±2% 0402 Paper T/R", Capacitance=15pF, Case Code (Imperial)=0402, Case Code (Metric)=1005, Dielectric=C0G, Max Operating Temperature=125°C, Min Operating Temperature=-55°C, Package Quantity=10000, Tolerance=2%, Voltage Rating=50V, Case/Package=0402, Depth=0.5mm, Height=0.5mm, Lead Free="Lead Free", Length=1mm, Mount="Surface Mount", Packaging="Tape and Reel", Radiation Hardening=No, Termination=SMD/SMT, Thickness=0.022inch, Voltage Rating (DC)=50V, Width=0.02inch
C16 C18: library part CMP-2000-06337-3, "Chip Multilayer Ceramic Capacitors for General Purpose, 0603, 22uF, X5R, 15%, 20%, 10V", Capacitance=22uF, Case Code (Imperial)=0603, Case Code (Metric)=1608, Dielectric=X5R, Max Operating Temperature=85°C, Min Operating Temperature=-55°C, Package Quantity=4000, Tolerance=20%, Voltage Rating=10V, Case/Package=0603, Depth=0.8mm, Height=0.8mm, Lead Free="Lead Free", Length=1.6mm, Material=Ceramic, Mount="Surface Mount", Packaging="Tape and Reel", REACH SVHC="No SVHC", Termination=SMD/SMT, Thickness=0.039inch, Voltage Rating (DC)=10V, Weight=0.000222oz, Width=0.8mm
C17 C20 C21 C22 C23: library part CMP-06035-026070-1, "Chip Multilayer Ceramic Capacitors for General Purpose, 0402, 10uF, X5R, 15%, 20%, 10V"
C34 C64 C65: library part CMP-06035-054841-1, "Ceramic Capacitor for Automotive 39nF ±10% 16VDC X7R 0402 Paper T/R", Capacitance=39nF, Case Code (Imperial)=0402, Case Code (Metric)=1005, Max Operating Temperature=125°C, Min Operating Temperature=-55°C, Ratings=AEC-Q200, Tolerance=10%, Voltage Rating=16V, Case/Package=0402, Mount="Surface Mount", Packaging="Cut Tape"
C35: library part CMP-03422-000661-1, "CC0402 2.7 nF X7R 10.00% 50 V", Capacitance="2.7 nF", Manufacturer=YAGEO, Package=CC0402, Temperature="-55°C to +125°C", Temperature Characteristic=X7R, Temperature Coefficient=30ppm/°C, Temperature Range High=+125°C, Temperature Range Low=-55°C, Tolerance=0.1, Voltage Rating="50 V", Automotive=No, Automotive Grade=NA, Category=Cap, ComponentLink2Description=Datasheet, ComponentLink2URL=http://www.yageo.com/documents/recent/UPY-GP_NP0_16V-to-50V_16.pdf, Device Class L1="Passive Components", Device Class L2=Capacitors, Device Class L3="Ceramic Capacitors", Footprint Url=http://www.yageo.com/exep/pages/download/literatures/UPY-C_GEN_24.pdf, Height=0.55mm, Ipc Land Pattern Name=CAPC10050X50, Lead Free=Yes, Manufacturer Part Number=CC0402KPX7R9BB272, Material=Ceramic, Octopart=https://octopart.com/cc0402kpx7r9bb272-yageo-84795372, RoHS=TRUE
C36: library part CMP-06035-017544-1, "Ceramic Capacitor for Automotive 1.2nF  ±5% 50VDC C0G 0603 Paper T/R", Capacitance=1.2nF, Case Code (Imperial)=0603, Case Code (Metric)=1608, Dielectric=C0G, Max Operating Temperature=125°C, Min Operating Temperature=-55°C, Package Quantity=10000, Ratings=AEC-Q200, Tolerance=5%, Voltage Rating=50V, Case/Package=0603, Height=0.8mm, Length=0.063inch, Mount="Surface Mount", Packaging="Tape and Reel", Termination=SMD/SMT, Thickness=0.035inch, Voltage Rating (DC)=50V, Weight=0.000222oz, Width=0.031inch
C38 C40 C42: library part CMP-2100-03589-1, "Chip Capacitor, 10 pF, +/- 5%, 50 V, -55 to 125 degC, 0402 (1005 Metric), RoHS, Tape and Reel", Capacitance=10pF, Case Code (Imperial)=0402, Case Code (Metric)=1005, Dielectric=C0G, Dielectric Material=Ceramic, Insulation Resistance=100GR, Manufacturer=Yageo, Max Operating Temperature=125degC, Min Operating Temperature=-55degC, Package Description="2-Pin Surface Mount Device, Body 1 x 0.5 mm", Package Quantity=1, Temperature Coefficient=30ppm/degC, Tolerance=5%, Voltage=50V, Case/Package=0402, Composition=Ceramic, Datasheet URL=http://www.yageo.com/documents/recent/UPY-GP_NP0_16V-to-50V_14.pdf, Datasheet Version="Rev. 14, 07/2016", Depth=0.5mm, Height=0.5mm, Lead Free=LeadFree, Length=1mm, Manufacturer URL=http://www.yageo.com/, Mount=SurfaceMount, Number of Pins=2, Package Reference=0402, Packaging=TapeandReel, Radiation Hardening=No, REACH SVHC=NoSVHC, RoHSCompliant=True, Termination=SMD/SMT, Thickness=0.022inch, Voltage Rating=50V, Voltage Rating (DC)=50V, Width=0.02inch
C43: library part CMP-2008-03945-2, "CAP CER 12PF 50V C0G/NP0 0402", Capacitance=12pF, Case Code (Imperial)=0402, Case Code (Metric)=1005, Dielectric=C0G, Max Operating Temperature=125°C, Min Operating Temperature=-55°C, Package Quantity=10000, Tolerance=2%, Voltage=50V, Case/Package=0402, Construction=Flat, Depth=0.5mm, Height=0.5mm, Lead Free="Lead Free", Length=1mm, Material=Ceramic, Mount="Surface Mount", Packaging="Tape and Reel", Radiation Hardening=No, REACH SVHC="No SVHC", Series=GRM, Termination=SMD/SMT, Thickness=0.022inch, Voltage Rating=50V, Voltage Rating (DC)=50V, Width=0.5mm
C45: library part CMP-06035-017743-1, "Ceramic Capacitor for Automotive 62pF ±2% 50VDC C0G 0402 Paper T/R"
C47 C48 C50: library part CMP-2008-03917-1, Manufacturer=Murata, Part Number=GRM1555C1H270JA01D
C49 C63 C66: library part CMP-2008-03917-1, Manufacturer=Murata, Part Number=GRM1555C1H270JA01D
C55 C57 C59: library part CMP-1662-00017-1, "Chip Capacitor, 1 nF, +/- 10%, 50 V, -55 to 125 degC, 0402 (1005 Metric), RoHS, Tape and Reel", Capacitance="1 nF", Case Code (Imperial)=0402, Case Code (Metric)=1005, Max Operating Temperature="125 degC", Min Operating Temperature="-55 degC", Package Quantity=10000, Tolerance=10%, Type (Capacitors)=X7R, Voltage Rating="50 V", Case\/Package=0402, ComponentLink1Description="Manufacturer URL", ComponentLink1URL=http://www.murata.com/, ComponentLink2Description=Datasheet, ComponentLink2URL=http://psearch.en.murata.com/capacitor/product/GRM155R71H102KA01%23.pdf, DatasheetVersion=07/2016, Height="0.5 mm", Length="1 mm", Mount="Surface Mount", Mounting Technology="Surface Mount", PackageDescription="2-Pin Surface Mount Device, Body 1 x 0.5 mm", PackageReference=0402, Packaging="Tape and Reel", Pins=2, Radiation Hardening=No, REACH SVHC="No SVHC", RoHSCompliant=true, Voltage Rating (DC)="50 V", Width="0.5 mm"
C56 C58 C60: library part CMP-2008-03915-1, Manufacturer=Murata, Part Number=GRM1555C1H101JA01D
D1 D2 D3 D4 D5: library part CMP-53976-000002-1, "LED RED DIFFUSED 1206 SMD", Colour=Red, Forward Current=20mA, Forward Voltage=2V, Manufacturer=VCC, Package=CMD15-21, Power Dissipation=105mW, Reverse Voltage=5V, Temperature="-40°C to +85°C", Temperature Range High=+85°C, Temperature Range Low=-40°C, Automotive=No, Category=Diode, ComponentLink2Description=Datasheet, ComponentLink2URL=https://www.vcclite.com/wp-content/uploads/wpallimport/files/files/CMD1521SeriesRev1.pdf, Device Class L1=Optoelectronics, Device Class L2=LEDs, Device Class L3=unset, Digikey Description="LED RED DIFFUSED 1206 SMD", Height=1.3mm, Lead Free=Yes, Led Orientation="Top View", Luminous Intensity=4mcd, Manufacturer Part Number=CMD15-21VRD/TR8, Mouser Description="Standard LEDs - SMD RED DIFFUSED", Octopart=https://octopart.com/cmd15-21vrd%2Ftr8-vcc-26668835, Peak Emmision Wavelength=640nm, RoHS=TRUE
J2 J3: library part CMP-02754-000006-1, "CONN SMA JACK STR 50OHM EDGE MNT", Case/Package=SMA, Dielectric Material=PTFE, Housing Color=Gold, Max Frequency=6GHz, Max Operating Temperature=125°C, Min Operating Temperature=-65°C, Package Quantity=1, Voltage Rating=335V, Body Material=Brass, Body Plating=Gold, Center Contact Plating=Gold, Connector Type=SMA, Contact Material=Copper, Contact Plating=Gold, Depth=13.33mm, Fastening Type=Threaded, Impedance=50R, Insulation Material=Polytetrafluoroethylene, Length=6.35mm, Mount=Edge, Orientation=Straight, Packaging=Tray, Radiation Hardening=No, RoHS Compliant=Yes, Series=SMA, Termination=Solder
J4 J5: "CONN HEADER VERT 3POS 2.54MM", Insulation Color=Natural, Manufacturer=Molex, Material Flammability Rating="UL94 V-0", Supplier Part Number 1=WM4112-ND, ComponentLink1Description=Datasheet, ComponentLink1URL=https://www.molex.com/pdm_docs/sd/022272031_sd.pdf, ComponentLink2Description="DigiKey Link", ComponentLink2URL=http://digikey.com/product-detail/en/molex/0022272031/WM4112-ND/1130578, Connector Type=Header, Contact Finish - Mating=Tin, Contact Finish - Post=Tin, Contact Finish Thickness - Mating="100.0µin (2.54µm)", Contact Length - Mating="0.295\" (7.49mm)", Contact Length - Post="0.140\" (3.56mm)", Contact Material=Brass, Contact Shape=Square, Contact Type="Male Pin", Fastening Type="Friction Lock", Insulation Height="0.461\" (11.70mm)", Insulation Material="Polyamide (PA), Nylon", LastUpdated="1/12/2020 11:51:54 PM", Lifecycle Status=Active, Minimum Order=1, Mounting Type="Through Hole", Number of Positions=3, Number of Positions Loaded=All, Number of Rows=1, Overall Contact Length="0.560\" (14.22mm)", Packaging=Bulk, Part Number=0022272031, Part Status=Active, PartId=77, Pitch - Mating="0.100\" (2.54mm)", Price=0.37, Series="KK 6410", Shrouding="Shrouded - 1 Wall", Style="Board to Cable/Wire", Supplier 1=DigiKey, Termination=Solder
L1 L2 L3 L4 L5: library part CMP-06042-017027-1, "Multilayer Type Inductor for Power Lines, 0805 (2012), 1μH, 30%, 0.0825Ω, 1.3A", Case Code (Imperial)=0805, Case Code (Metric)=2012, Current Rating=1.3A, DC Resistance (DCR)=82.5mR, Inductance=1uH, Inductance Tolerance=30%, Max Operating Temperature=125°C, Min Operating Temperature=-55°C, Package Quantity=4000, Self Resonant Frequency=50MHz, Test Frequency=1MHz, Case/Package=0805, Core Material=Ferrite, DC Current=1.3A, Depth=1.4mm, Height=0.9mm, Height - Seated (Max)=0.039inch, Length=2mm, Max DC Current=1.3A, Military Standard=Not, Mount="Surface Mount", Packaging="Tape and Reel", REACH SVHC="No SVHC", RoHS Compliant=Yes, Series=LQM21PN_GR, Shielding=Shielded, Termination=SMD/SMT, Tolerance=30%, Weight=0.000194oz, Width=0.049inch
R1: library part CMP-2000-01731-1, Manufacturer="KOA Speer", Part Number=RK73H1JTTD91R0F, Valu=9.6k
R2 R3 R7 R10: library part CMP-1659-00009-5, "RES 1K OHM 1% 1/10W 0603", Case Code (Imperial)=0603, Case Code (Metric)=1608, Max Operating Temperature=155°C, Max Power Dissipation=100mW, Min Operating Temperature=-55°C, Resistance=1kR, Resistance Tolerance=1%, Resistor Type="Thick Film", Temperature Coefficient=100ppm/°C, Voltage Rating=50V, Case/Package=0603, Construction=Rectangular, Contact Plating=Tin, Depth=0.8mm, Features="Moisture Resistant", Height=0.45mm, Lead Free="Lead Free", Length=1.6mm, Military Standard=Not, Number of Terminations=2, Packaging="Tape and Reel", Power Rating=100mW, Radiation Hardening=No, REACH SVHC="No SVHC", RoHS Compliant=Yes, Series=RC, Size Code=0603, Technology="THICK FILM", Termination=SMD/SMT, Tolerance=1%
R4 R5: library part CMP-1011-00036-2, Manufacturer="Yageo / Phycomp", Part Number=RC0402JR-0727RL
R6 R12 R15 R16 R17 R22: library part CMP-03412-023045-1, "RES SMD 200 OHM 0.1% 1/16W 0402", Manufacturer=Yageo, Package=RT0402, Power Rating=0.063W, Resistance=200Ω, Temperature="-55°C to +155°C", Temperature Coefficient="25 ppm/°C", Temperature Range High=+155°C, Temperature Range Low=-55°C, Tolerance=0.001, Voltage Rating=50V, Automotive=No, Category=Res, ComponentLink2Description=Datasheet, ComponentLink2URL=http://www.yageo.com/documents/recent/PYu-RT_1-to-0.01_RoHS_L_9.pdf, Composition="Thin Film", Device Class L1="Passive Components", Device Class L2=Resistors, Device Class L3="Chip SMD Resistors", Digikey Description="RES SMD 200 OHM 0.1% 1/16W 0402", Footprint Url=http://www.yageo.com/exep/pages/download/literatures/PYu-R_Mount_10.pdf, Height=0.35mm, Ipc Land Pattern Name=RESC10050X30, Lead Free=Yes, Manufacturer Part Number=RT0402BRD07200RL, Mouser Description="Thin Film Resistors - SMD 1/16W 200 ohm .1% 25ppm", Octopart=https://octopart.com/rt0402brd07200rl-yageo-1238579, RoHS=TRUE, Series=RT
R8 R9 R19 R21 R23 R24: library part CMP-2000-06942-1, "Chip Resistor, 4.7 KOhm, +/- 1%, 0.1 W, -55 to 155 degC, 0603 (1608 Metric), RoHS, Tape and Reel", Case Code - in=0603, Case Code - mm=1608, Manufacturer=Yageo, Operating Temperature Range=-55Cto+155C, Package Description="2-Pin Surface Mount Device, Body 1.6 x 0.8 mm", Power Rating=100mW, Resistance=4.7kOhms, Temperature Coefficient=100PPM/C, Tolerance=1%, Voltage Rating=50V, Datasheet URL=http://www.yageo.com/documents/recent/PYu-RC_Group_51_RoHS_L_7.pdf, Datasheet Version="Rev. 7, 05/2017", Manufacturer URL=http://www.yageo.com/, Mounting Technology=SurfaceMount, Package Reference=0603, Packaging=Reel, Product=ThickFilmResistorsGeneralPurpose, Series=RC, Termination Style=SMD/SMT
R11 R13: library part CMP-03412-025742-1, "RES SMD 200K OHM 0.1% 1/16W 0402", Manufacturer=Yageo, Package=RT0402, Power Rating=0.063W, Resistance=200KΩ, Temperature="-55°C to +155°C", Temperature Coefficient="25 ppm/°C", Temperature Range High=+155°C, Temperature Range Low=-55°C, Tolerance=0.001, Voltage Rating=50V, Automotive=No, Category=Res, ComponentLink2Description=Datasheet, ComponentLink2URL=http://www.yageo.com/documents/recent/PYu-RT_1-to-0.01_RoHS_L_9.pdf, Composition="Thin Film", Device Class L1="Passive Components", Device Class L2=Resistors, Device Class L3="Chip SMD Resistors", Digikey Description="RES SMD 200K OHM 0.1% 1/16W 0402", Footprint Url=http://www.yageo.com/exep/pages/download/literatures/PYu-R_Mount_10.pdf, Height=0.35mm, Ipc Land Pattern Name=RESC10050X30, Lead Free=Yes, Manufacturer Part Number=RT0402BRD07200KL, Octopart=https://octopart.com/rt0402brd07200kl-yageo-71392655, RoHS=TRUE, Series=RT
R14: library part CMP-2002-07143-1, Manufacturer="Yageo / Phycomp", Part Number=RC0402FR-07910KL
R18: library part CMP-2002-08032-1, Manufacturer="Yageo / Phycomp", Part Number=RC0402JR-07680RL
R20: library part CMP-2000-04266-1, Manufacturer=Yageo, Part Number=RC0603JR-07360RL
S1 S2: "SWITCH TACTILE SPST-NO 0.05A 24V", Contact Rating @ Voltage="0.05A @ 24VDC", Manufacturer="TE Connectivity ALCOSWITCH Switches", Operating Force=160gf, Operating Temperature="-35°C ~ 85°C", Supplier Part Number 1=450-1129-ND, Actuator Height off PCB, Vertical=5.00mm, Actuator Orientation="Top Actuated", Actuator Type=Standard, Circuit=SPST-NO, ComponentLink1Description=Datasheet, ComponentLink1URL=https://www.te.com/commerce/DocumentDelivery/DDEController?Action=srchrtrv&DocNm=1308111-1_SWITCHES_CORE_PROGRAM_CATALOG&DocType=CS&DocLang=English, ComponentLink2Description="DigiKey Link", ComponentLink2URL=https://www.digikey.com/en/products/detail/te-connectivity-alcoswitch-switches/FSM4JSMA/525821, Illumination=Non-Illuminated, LastUpdated="6/3/2024 8:19:31 PM", Lifecycle Status=Active, Minimum Order=1, Mounting Type="Surface Mount", Outline="6.00mm x 6.00mm", Packaging=Bulk, Part Number=FSM4JSMA, Part Status=Active, Price=0.14, Series=FSMJSMA, Supplier 1=DigiKey, Switch Function=Off-Mom, Termination Style="Gull Wing"
U3: library part CMP-04948-000007-1, "GEN 2 HUMIDITY SENSOR", Manufacturer="Texas Instruments", Max Supply Voltage=3.6V, Min Supply Voltage=1.62V, Operating Supply Current=0.105-650uA, Package=YPA0006, Temperature="-40°C to +85°C", Temperature Range High=+85°C, Temperature Range Low=-40°C, Accuracy=2%, Automotive=No, Category=IC, ComponentLink2Description=Datasheet, ComponentLink2URL=http://www.ti.com/lit/ds/symlink/hdc2010.pdf, Device Class L1=Sensors, Device Class L2="Temperature and Humidity Sensors", Device Class L3=unset, Digikey Description="GEN 2 HUMIDITY SENSOR", Height=0.675mm, Interface=I2C, Ipc Land Pattern Name=BGA6N50P2X3_146X146X67, Lead Free=Yes, Manufacturer Part Number=HDC2010YPAR, Mouser Description="Low Power Humidity and Temperature Digital Sensor 6-DSBGA -40 to 85", Octopart=https://octopart.com/hdc2010ypar-texas+instruments-84791680, Resolution=14bits, RoHS=TRUE, Sensor Output=I2C, Standoff Height=0.215mm
U4: library part CMP-04877-000014-1, "IC USB TYPE-C LOGIC/PORT 12X2QFN", Max Operating Temperature=85°C, Min Operating Temperature=-40°C, Lead Free="Lead Free", Mount="Surface Mount", Number of Pins=12, Packaging="Tape and Reel", RoHS Compliant=Yes
U6 U7: library part CMP-04917-000053-1, "IC REG LINEAR 3.3V 300MA SOT23-5", Dropout Voltage=125mV, Manufacturer="Texas Instruments", Max Junction Temp=+125°C, Max Supply Voltage=5.5V, Min Supply Voltage=1.4V, Nominal Supply Current=34uA, Output Current=300mA, Output Voltage=3.3V, Package=DBV0005A, Temperature="-40°C to +125°C", Temperature Range Low=-40°C, Accuracy Percentage=1%, Automotive=No, Category=IC, ComponentLink2Description=Datasheet, ComponentLink2URL=http://www.ti.com/lit/ds/symlink/tlv733p.pdf, Device Class L1="Integrated Circuits (ICs)", Device Class L2="Power Management ICs", Device Class L3="Voltage Regulators - Linear", Digikey Description="IC REG LINEAR 3.3V 300MA SOT23-5", Height=1.45mm, Lead Free=Yes, Manufacturer Part Number=TLV73333PDBVR, Mouser Description="LDO Voltage Regulators Capacitr-Free 300-mA 5-SOT-23 -40 to 125", Number of Outputs=1, Octopart=https://octopart.com/tlv73333pdbvr-texas+instruments-51080890, Output Type=Fixed, RoHS=TRUE, Standoff Height=0mm, Temperature Range High=+125°C
U8: library part CMP-0287-00015-1, "Wideband Synthesizer with Integrated VCO, CP-32-2, Pb-Free, 1500 Reel", Frequency Range=35MHz-4.4GHz, Supply Current=110mA, Code_JEDEC=MO-220-VHHD-2, ComponentLink1Description="Manufacturer URL", ComponentLink1URL=www.analog.com, ComponentLink2Description=Datasheet, ComponentLink2URL=http://www.analog.com/static/imported-files/data_sheets/ADF4351.pdf, ComponentLink3Description="Package Specification", ComponentLink3URL=http://www.analog.com/static/imported-files/packages/414143737956480539664569CP_32_2.pdf, DatasheetVersion="Rev. Pr D", Max REFin (MHz)=250MHz, Max RF Input (MHz)=4.4GHz, Norm Phase Noise (dBc/Hz)=-221dBc, PackageDescription="32-Lead Lead Frame Chip Scale Package [LFCSP_VQ]", PackageReference=CP-32-2, PackageVersion=Jan-2005, RF Prescalers=4/5,8/9, Single/Dual=Single
U9: library part CMP-0285-00050-1, "400 MHz to 6 GHz Quadrature Demodulator, CP-24-3, Pb-Free, 1500 Reel", IQ Freq (MHz)=390MHz, Max RF Frequency (MHz)=6GHz, Min RF Frequency (MHz)=400MHz, Amplitude Error (dB)=70mdB, Code_JEDEC=MO-220-VGGD-8, ComponentLink1Description="Manufacturer URL", ComponentLink1URL=www.analog.com, ComponentLink2Description=Datasheet, ComponentLink2URL=http://www.analog.com/static/imported-files/data_sheets/ADL5380.pdf, ComponentLink3Description="Package Specification", ComponentLink3URL=http://www.analog.com/static/imported-files/packages/56702234806764CP_24_3.pdf, DatasheetVersion="Rev. 0", IIP3 (+dBm)=22dBm, Output P1dB (dBm)=12, PackageDescription="24-Lead Lead Frame Chip Scale Package [LFCSP_VQ]", PackageReference=CP-24-3, PackageVersion=Jan-2005, Phase Error (deg)=0.2Deg
U10: library part CMP-0003-02161-1, "14-Bit, 2 MSPS, Dual-Channel, Unipolar, Differential, u-Power SAR ADC, -40 to 85 degC, 16-pin QFN (RTE16), Green (RoHS & no Sb/Br)", Analog Voltage AV/DD(Max)(V)=5.25, Analog Voltage AV/DD(Min)(V)=2.7, Manufacturer="Texas Instruments", # Input Channels=2, Architecture=SAR, Code_JEDEC=MO-220, ComponentLink1Description="Manufacturer URL", ComponentLink1URL=http://www.ti.com/, ComponentLink2Description=Datasheet, ComponentLink2URL=http://www.ti.com/general/docs/lit/getliterature.tsp?genericPartNumber=ADS7945&fileType=pdf, ComponentLink3Description="Package Specification", ComponentLink3URL=http://www.ti.com/litv/pdf/mpqf149c, DatasheetVersion=SBAS539B, Digital Supply(Max)(V)=5.25, Digital Supply(Min)(V)=1.65, Eco-Plan="Green (RoHS & no Sb/Br)", INL(Max)(+/-LSB)=1.5, Interface="Serial SPI", Mounting Technology="Surface Mount", PackageDescription="16-Pin Plastic Flat Pack, Body 3 x 3 mm, Pitch 0.5 mm", PackageReference=RTE16-1700X1700TP, PackageVersion="4205254/D, 01/2011", PartNumber=ADS7945SRTER, Resolution(Bits)=14, Sample Rate (max)(SPS)=2M, SFDR(dB)=94, SINAD(dB)=83.5, SNR(dB)=84, SubFamily="Precision ADC (<=10MSPS)"
Y1: library part CMP-00370-144810711-1, "\"LOW-JITTER, HIGH-PERFORMANCE, BU\" 25 MHz LVCMOS Oscillator 1.8V Enable/Disable 4-VDFN", Ambient Temperature Range High=105°C, Frequency=25MHz, Load Capacitance=30pF, Manufacturer Lifecycle Status=ACTIVE, Max Junction Temperature (Tj)=125°C, Max Supply Voltage=1.9V, Min Operating Temperature=-40°C, Min Supply Voltage=1.7V, ComponentLink1Description="Manufacturer's Website", ComponentLink1URL=http://ti.com, ComponentLink2Description="Datasheet URL", ComponentLink2URL=https://www.ti.com/lit/ds/symlink/lmk6c.pdf, Height=1mm, HelpURL=https://www.ti.com/lit/ds/symlink/lmk6c.pdf, Length=2.5mm, Lifecycle Status=Production, Max Operating Temperature=105°C, Number of Pins=4, RoHS=Compliant, Thickness=900µm, Width=2mm

## Via types
v1: diameter 19.68, hole 7.87, Top Layer to Bottom Layer, 13 vias
v2: diameter 10, hole 6, Top Layer to Bottom Layer, 10 vias
v3: diameter 19.68, hole 11.81, Top Layer to Bottom Layer, 5 vias
v4: diameter 20, hole 12, Top Layer to Bottom Layer, 1 vias